# Altium PCB STM32.PcbDoc
Units mm, origin at the board's own origin, x right, y up, seen from the top; angles counter-clockwise.
Board outline 45.5 x 80.5 mm, 2 copper layers (Top Layer, Bottom Layer); 57 components, 45 nets, 197 pads, 14 vias.
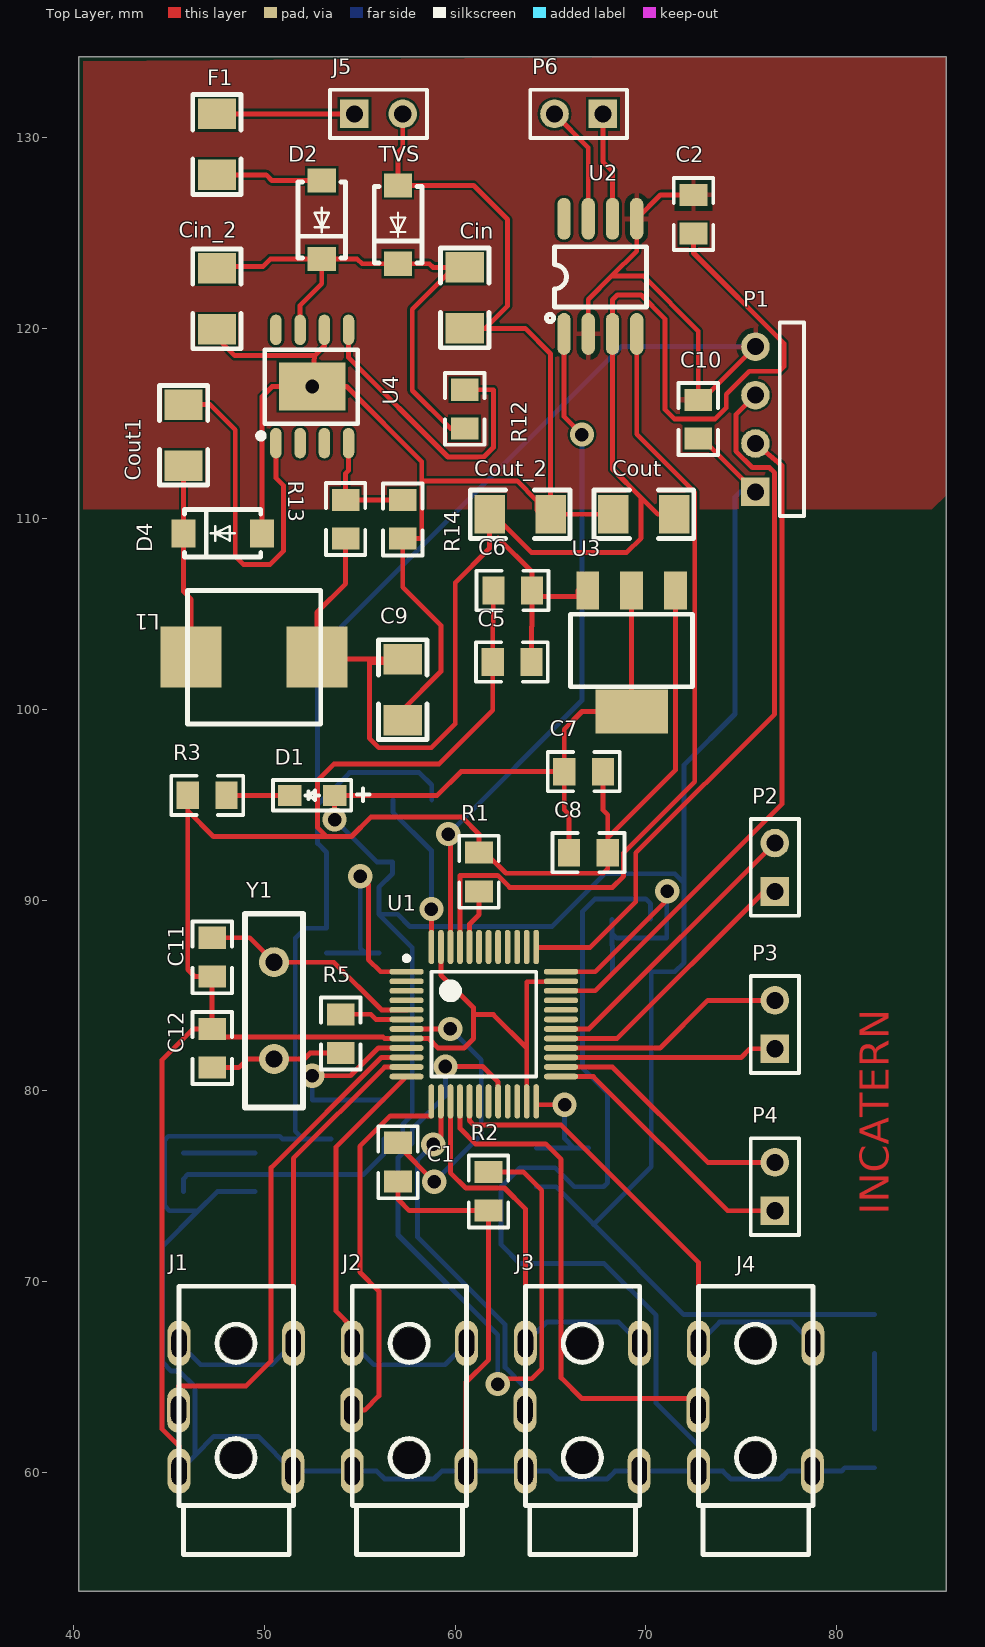
[diagram p0: Top Layer view]
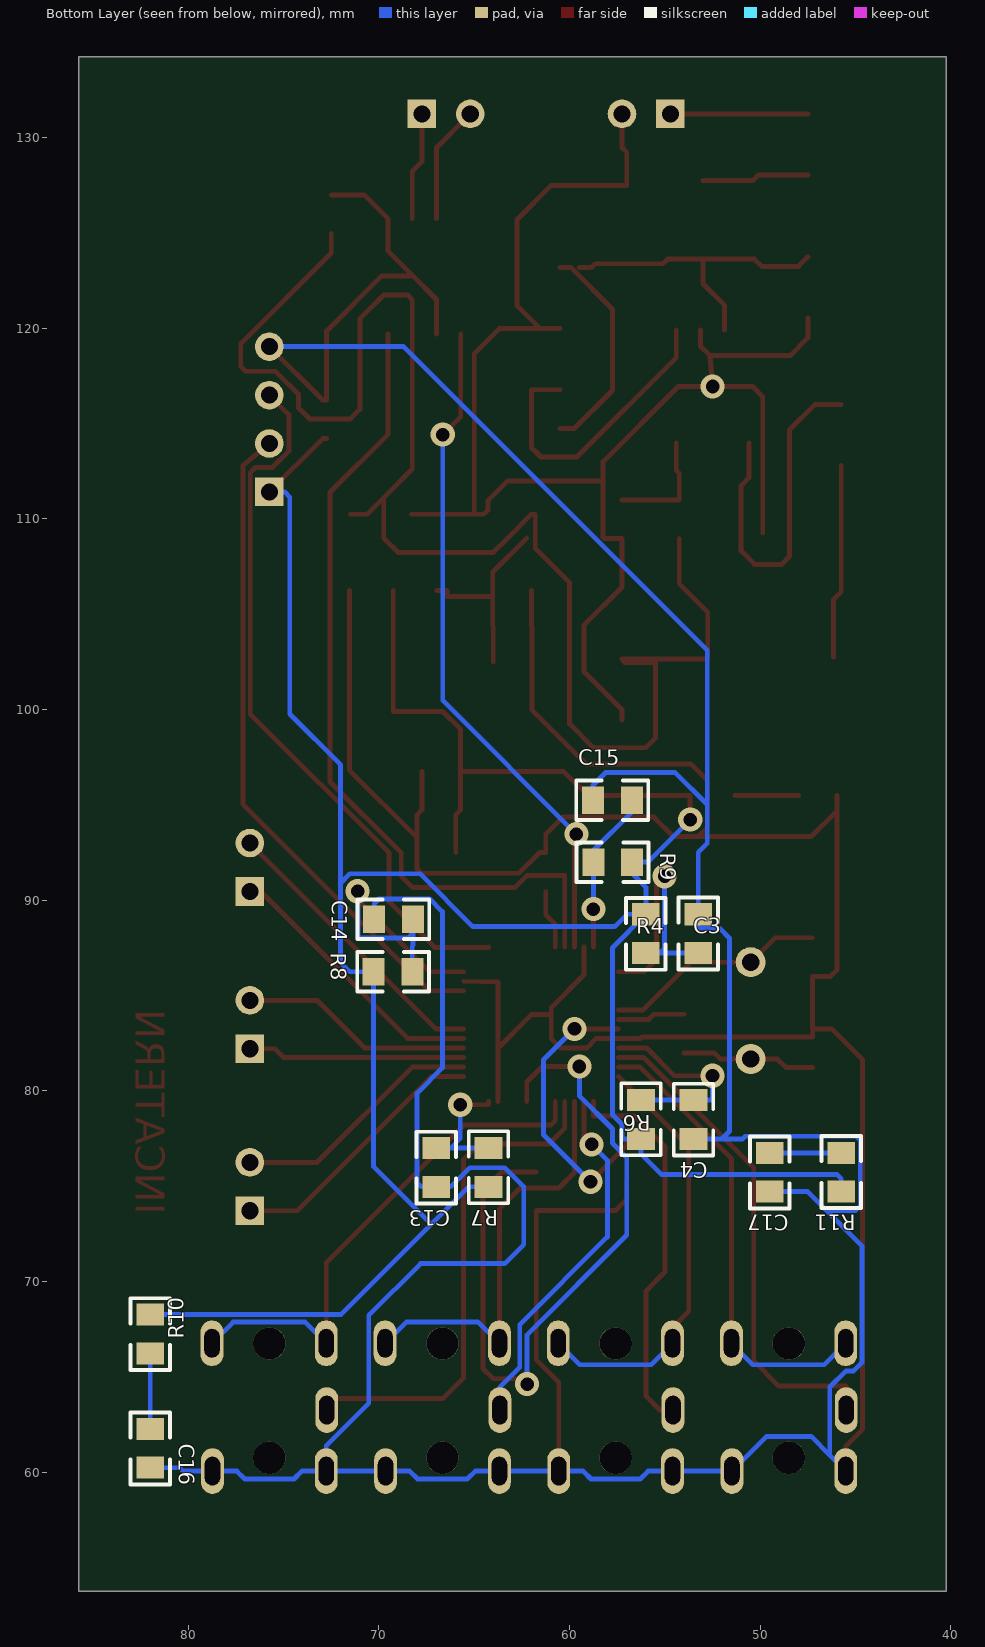
[diagram p1: Bottom Layer view, seen from below]

## Layer stack, top to bottom
Top Solder: solder mask 0.0102, Solder Resist, Dk 3.5
Top Layer: signal copper 0.0356
Dielectric 1: dielectric 0.32, FR-4, Dk 4.8
Bottom Layer: signal copper 0.0356
Bottom Solder: solder mask 0.0102, Solder Resist, Dk 3.5

## Board outline
40.25,53.75 40.25,134.25 85.75,134.25 85.75,53.75

## Design rules (kind name [scope] priority, off if disabled: settings)
Clearance [All] p1: gap=0.127 ignorepadtopadclearanceinfootprint=FALSE
PolygonConnect [All] p1: connectstyle=Relief reliefconductorwidth=0.254 reliefentries=4 polygonreliefangle="90 Angle" airgapwidth=0.254
RoutingVias [All] p1: holewidth=0.711 width=1.27 viastyle="Through Hole" minholewidth=0.711 minwidth=1.27 maxholewidth=0.711 maxwidth=1.27
SolderMaskExpansion [All] p1: expansion=0.102
Width [All] p1: maxlimit=0.254 minlimit=0.254 preferedwidth=0.254
30 further rules are at their usual default settings.

## Classes and differential pairs
component class POWER: C9 Cin Cin_2 Cout Cout1 Cout_2 D2 D4 F1 J5 L1 R12 R13 R14 TVS U4
component class STM32: C1 C2 C3 C4 C5 C6 C7 C8 C10 C11 C12 C13 C14 C15 C16 C17 D1 J1 J2 J3 J4 P1 P2 P3 P4 P6 R1 R2 R3 R4 R5 R6 R7 R8 R9 R10 R11 U1 U2 U3 Y1

## Components (designator, comment, footprint, x,y, rotation, side; value= is the part's Value field where it differs from the comment)
C1 "0.1uF" 0805 57,76.266 r90 top value=104
C2 "100nF" 0805 72.5,125.984 r270 top value=104
C3 "100nF" 0805 53.25,88.25 r270 bottom value=104
C4 "1uF" 0805 53.5,78.5 r90 bottom value=104
C5 "105,0603" 0805 62.984,102.5 r0 top value=104
C6 "105,0603" 0805 63.016,106.25 r0 top value=104
C7 "" 0805 66.734,96.75 r180 top value=100nF
C8 "105,0603" 0805 66.984,92.5 r180 top value=10uF
C9 "Cap Pol3" 1206 57.25,101 r270 top value=220uF
C10 "104" 0805 72.75,115.234 r270 top
C11 "105,0603" 0805 47.25,87.016 r90 top value=104
C12 "105,0603" 0805 47.25,82.234 r270 top value=104
C13 "1uF" 0805 67,75.984 r90 bottom value=104
C14 "1uF" 0805 69.234,89 r180 bottom value=104
C15 "1uF" 0805 57.75,95.25 r180 bottom value=104
C16 "1uF" 0805 82,61.25 r90 bottom value=104
C17 "1uF" 0805 49.5,75.734 r90 bottom value=104
Cin "GRM32ER71J106KA12L" 1206 60.5,121.549 r270 top value=4.7uF
Cin_2 "GRM32ER71J106KA12L" 1206 47.5,121.5 r270 top value=4.7uF
Cout "C1608X5R1A226M080AC" 1206 69.849,110.25 r180 top value=10uF
Cout1 "C1608X5R1A226M080AC" 1206 45.75,114.349 r270 top value=10pF
Cout_2 "C1608X5R1A226M080AC" 1206 63.451,110.25 r0 top value=1uF
D1 "LED" LED 52.5,95.5 r0 top
D2 "Diode 1N4007" SMA(DO-214AC) 53,125.718 r270 top
D4 "B340A-E3/61T" SMA(DO-214AC) 47.833,109.25 r180 top
F1 "Fuse 2" 1206 47.5,129.599 r270 top
J1 "S0" AUDIO-PJ313D 48.5,63.448 r180 top
J2 "S1" AUDIO-PJ313D 57.583,63.448 r180 top
J3 "S2" AUDIO-PJ313D 66.667,63.448 r180 top
J4 "S3" AUDIO-PJ313D 75.75,63.448 r180 top
J5 "2 Pin" HDR1X2 54.71,131.25 r0 top
L1 "22uH" L7070 49.448,102.75 r0 top
P1 "SWD" HDR1X4H 75.75,111.42 r90 top
P2 "Header 2" HDR1X2 76.77,90.46 r90 top
P3 "Header 2" HDR1X2 76.77,82.21 r90 top
P4 "Header 2" HDR1X2 76.77,73.71 r90 top
P6 "Header 2" HDR1X2 67.75,131.25 r180 top
R1 "10K,0603" 0805 61.25,91.484 r270 top
R2 "10K,0603" 0805 61.75,74.734 r90 top
R3 "10K,0603" 0805 46.984,95.5 r180 top
R4 "10K,0603" 0805 56,88.25 r90 bottom
R5 "1M,0603" 0805 54,83 r270 top
R6 "10K,0603" 0805 56.25,78.5 r270 bottom
R7 "10K,0603" 0805 64.25,75.984 r270 bottom
R8 "10K,0603" 0805 69.266,86.25 r0 bottom
R9 "10K,0603" 0805 57.734,92 r180 bottom
R10 "10K,0603" 0805 82,67.25 r90 bottom
R11 "10K,0603" 0805 45.75,75.734 r270 bottom
R12 "" 0805 60.5,115.766 r270 top
R13 "10K,0603" 0805 54.25,109.984 r270 top
R14 "3.2k" 0805 57.25,109.984 r90 top
TVS "TVS" SMA(DO-214AC) 57,125.468 r270 top (schematic designator D3)
U1 "STM32F103C8T6" 48P 61.5,83.5 r0 top
U2 "TJA1050" SOIC-8_150MIL 67.615,122.753 r90 top
U3 "LD1117S33CTR" SOT-223 69.25,103.075 r270 top
U4 "TPS5430DDAR" SOP-8_EP_150MIL 52.5,117 r90 top
Y1 "32.768K" XTAL1 50.5,81.67 r90 top

## Footprints (in the part's own frame and the unit in brackets; to place one, negate y for a bottom-side part, rotate by r counter-clockwise, add the part's x,y. Pads: shape width x height; smd on the part's side, far side on the other; paste and mask are expansions set on the pad)
48P [mm]
  oval 1.8x0.3 smd: 1(-4.05,2.75) 2(-4.05,2.25) 3(-4.05,1.75) 4(-4.05,1.25) 5(-4.05,0.75) 6(-4.05,0.25) 7(-4.05,-0.25) 8(-4.05,-0.75) 9(-4.05,-1.25) 10(-4.05,-1.75) 11(-4.05,-2.25) 12(-4.05,-2.75) 25(4.05,-2.75) 26(4.05,-2.25) 27(4.05,-1.75) 28(4.05,-1.25) 29(4.05,-0.75) 30(4.05,-0.25) 31(4.05,0.25) 32(4.05,0.75) 33(4.05,1.25) 34(4.05,1.75) 35(4.05,2.25) 36(4.05,2.75)
  oval 0.3x1.8 smd: 13(-2.75,-4.05) 14(-2.25,-4.05) 15(-1.75,-4.05) 16(-1.25,-4.05) 17(-0.75,-4.05) 18(-0.25,-4.05) 19(0.25,-4.05) 20(0.75,-4.05) 21(1.25,-4.05) 22(1.75,-4.05) 23(2.25,-4.05) 24(2.75,-4.05) 37(2.75,4.05) 38(2.25,4.05) 39(1.75,4.05) 40(1.25,4.05) 41(0.75,4.05) 42(0.25,4.05) 43(-0.25,4.05) 44(-0.75,4.05) 45(-1.25,4.05) 46(-1.75,4.05) 47(-2.25,4.05) 48(-2.75,4.05)
  silkscreen extent -4.17,-2.75 2.75,3.57, body extent -3.5,-3.5 3.5,3.5, height 1.6
0805 [mm]
  rect 1.16x1.45 smd: 1(-1.016,0) 2(1.016,0)
  silkscreen extent -1.9,-1.03 1.87,1.04
1206 [mil]
  rect 63x78.74 smd: 1(-65,0) 2(60.98,0)
  silkscreen extent -105,-50 101,50
AUDIO-PJ313D [mm]
  round 1.7 hole 1.7: 0(0,2.692) 0(0,-3.302)
  oval 1.2x2.4 hole 0.8 slot 1.5 at 90 deg: 2(-2.984,3.392) 2(2.985,3.392) 3(3.01,0.192) 4(-3.01,-3.314) 4(2.985,-3.314)
  silkscreen extent -3.02,-6.3 2.98,7.76
HDR1X2 [mm] "Connector; Header; 2 Position"
  rect 1.5x1.5 hole 0.9: 1(0,0)
  round 1.5 hole 0.9: 2(2.54,0)
  silkscreen extent -1.27,-1.27 3.81,1.27
HDR1X4H [mm] "Connector; Header; 4 Position; Right Angle"
  rect 1.5x1.5 hole 0.9: 1(0,0)
  round 1.5 hole 0.9: 2(2.54,0) 3(5.08,0) 4(7.62,0)
  silkscreen extent -1.27,-2.54 8.89,-1.27
L7070 [mm]
  rect 3.2x3.2 smd: 1(-3.298,0) 2(3.302,0)
  silkscreen extent -3.5,-3.5 3.5,3.5
LED [mil]
  rect 49x43 smd: 1(46.26,0) 2(-46.26,0)
  silkscreen extent -81,-31 118,31
SMA(DO-214AC) [mil]
  rect 50x57.9 smd: 1(-80,0) 2(82,0)
  silkscreen extent -77,-49 80,49
SOIC-8_150MIL [mm]
  oval 2.2x0.7 smd: 1(-3.048,1.905) 2(-3.048,0.635) 3(-3.048,-0.635) 4(-3.048,-1.905) 5(2.997,-1.905) 6(2.997,-0.635) 7(2.997,0.635) 8(2.997,1.905)
  silkscreen extent -2.4,-2.41 1.52,2.83
SOP-8_EP_150MIL [mm]
  oval 1.6x0.6 smd: 1(-3.023,1.905) 2(-3.023,0.635) 3(-3.023,-0.635) 4(-3.023,-1.905) 5(2.921,-1.905) 6(2.921,-0.635) 7(2.921,0.635) 8(2.921,1.905)
  rect 2.5x3.5 smd: 9(-0.051,0)
  silkscreen extent -2.79,-2.39 1.88,2.84
SOT-223 [mm]
  rect 2x1.2 smd: 1(-3.175,2.3) 2(-3.175,0) 3(-3.175,-2.3)
  rect 2.3x3.8 smd: 4(3.175,0)
  silkscreen extent -1.92,-3.2 1.87,3.2
XTAL1 [mil]
  round 62 hole 35.43: 1(0,0) 2(200,0)
  silkscreen extent -100,-60 300,60

## Part data
C1 C2 C3 C4 C5 C6 C7 C8 C10 C11 C12 C13 C14 C15 C16 C17: library part Cap, "Capacitor", LatestRevisionDate=17-Jul-2002, LatestRevisionNote="Re-released for DXP Platform.", Published=8-Jun-2000, Publisher="Altium Limited"
C9: "Polarized Capacitor (Surface Mount)", LatestRevisionDate=29-May-2009, LatestRevisionNote="IPC-7351 Footprint Added.", PackageDescription="Chip Capacitor", PackageReference=C0805, Published=8-Jun-2000, Publisher="Altium Limited"
Cin Cin_2: "GRM32ER71J106KA1", Manufacturer Name=MuRata, Manufacturer Part Number=GRM32ER71J106KA12L, PackageReference=GRM32ER71J106KA12L
Cout Cout1 Cout_2: "C1608X5R1A226M08", Manufacturer Name=TDK, Manufacturer Part Number=C1608X5R1A226M080AC, PackageReference=C1608X5R1A226M080AC
D2: "1 Amp General Purpose Rectifier", Code_JEDEC=DO-204-AL, ComponentLink1Description="Manufacturer Link", ComponentLink1URL=http://www.fairchildsemi.com/, ComponentLink2Description=Datasheet, ComponentLink2URL=http://www.fairchildsemi.com/ds/1N%2F1N4001.pdf, DatasheetVersion=1998, LatestRevisionDate=17-Jul-2002, LatestRevisionNote="Re-released for DXP Platform.", PackageDescription="Diode, Axial; Body 5.2 x 2.7 mm (LxDia. max), Lead Dia. 0.86 mm (max)", PackageReference=DO-41, PackageVersion=Aug-1999, Published=8-Jun-2000, Publisher="Altium Limited"
D4: BOM_Manufacturer=VISHAY, BOM_Manufacturer Part=B340A-E3/61T, BOM_Supplier=LCSC, BOM_Supplier Part=C15570, image=//image.lceda.cn/szlcsc/C15570.jpg, spicePre=D
F1: "Fuse", LatestRevisionDate=17-Jul-2002, LatestRevisionNote="Re-released for DXP Platform.", PackageDescription="Thru-Hole; 2 Leads", PackageReference=PIN-W2/E2.8, Published=8-Jun-2000, Publisher="Altium Limited"
J1 J2 J3 J4: library part Stereo-jack, BOM_Manufacturer=BOOMELE, BOM_Manufacturer Part="Straight headphone jack", BOM_Supplier=LCSC, BOM_Supplier Part=C18167, spicePre=J
L1: library part 100uH, BOM_Manufacturer=TAITEC, BOM_Manufacturer Part=NLV32T-150J-PF, BOM_Supplier=LCSC, BOM_Supplier Part=C304294, Contributor=LCSC, nameAlias=Inductance, spicePre=L, spiceSymbolName=FPI0705F-101M
P1: library part "Header 4", "Header, 4-Pin", LatestRevisionDate=17-Jul-2002, LatestRevisionNote="Re-released for DXP Platform.", Publisher="Altium Limited"
P2 P3 P4 P6: "Header, 2-Pin", LatestRevisionDate=17-Jul-2002, LatestRevisionNote="Re-released for DXP Platform.", Publisher="Altium Limited"
R1 R2 R3 R4 R5 R6 R7 R8 R9 R10 R11 R12 R13 R14: library part Res2, "Resistor", LatestRevisionDate=17-Jul-2002, LatestRevisionNote="Re-released for DXP Platform.", Published=8-Jun-2000, Publisher="Altium Limited"
TVS: library part "Diode 1N4007", "1 Amp General Purpose Rectifier", Code_JEDEC=DO-204-AL, ComponentLink1Description="Manufacturer Link", ComponentLink1URL=http://www.fairchildsemi.com/, ComponentLink2Description=Datasheet, ComponentLink2URL=http://www.fairchildsemi.com/ds/1N%2F1N4001.pdf, DatasheetVersion=1998, LatestRevisionDate=17-Jul-2002, LatestRevisionNote="Re-released for DXP Platform.", PackageDescription="Diode, Axial; Body 5.2 x 2.7 mm (LxDia. max), Lead Dia. 0.86 mm (max)", PackageReference=DO-41, PackageVersion=Aug-1999, Published=8-Jun-2000, Publisher="Altium Limited"
U3: BOM_Manufacturer=STMicroelectronics, BOM_Manufacturer Part=LD1117S33CTR, BOM_Supplier=LCSC, BOM_Supplier Part=C35879, image=//image.lceda.cn/szlcsc/C35879.jpg, spicePre=U
U4: BOM_LCSC Assembly=Yes, BOM_Manufacturer=TI, BOM_Manufacturer Part=TPS5430DDAR, BOM_Supplier=LCSC, BOM_Supplier Part=C9864, image=//image.lceda.cn/szlcsc/C9864.jpg, spicePre=U
Y1: library part XTAL, "Crystal Oscillator", LatestRevisionDate=17-Jul-2002, LatestRevisionNote="Re-released for DXP Platform.", Published=8-Jun-2000, Publisher="Altium Limited"

## Via types
v1: diameter 1.27, hole 0.711, Top Layer to Bottom Layer, 14 vias

## Nets (pads, with @x,y where several pads share a name; then routed paths per layer and width w, separated by ;. In a path a pad name is that pad's centre, name@x,y a point inside that pad or via, vN(x,y) a via of type N, cw(c..) or ccw(c..) an arc to the next point about the centre after c; other vN are vias at no path point)
0: C9.2 Cin.2 Cin_2.2 Cout.2 Cout_2.2 D4.1 J5.2 R14.1 TVS.1 U4.6 U4.9 | length 84.4
  Top Layer w0.254: Cin_2.2@47.5,120.55 Cin_2.2 47.5,119.5 48.433,118.567 52.627,118.567 ; D4.1 49.865,116.42 50.394,116.949 v1(52.5,116.949) ; U4.6 53.135,119.075 52.627,118.567 ; C9.2 57.25,100 59.25,102 59.25,104.426 57.25,106.426 R14.1 58.191,108.968 58.242,109.019 58.242,112 ; J5.2 57.25,129.485 57,129.235 TVS.1 60.96,127.5 62.75,125.71 62.75,121.18 61.57,120 ; Cin.2 61.57,120 ; Cout.2 Cout_2.2 ; v1(52.5,116.949) 54.305,116.949 58.242,113.012 58.242,112 ; v1(52.5,116.949) 52.627,118.567 ; 58.242,112 63.25,112 64.285,110.965 64.285,110.465 64.5,110.25 Cout_2.2 ; 61.57,120 63.669,120 65,118.669 Cout_2.2
5V: C2.2 C5.2 C6.2 C9.1 Cout.1 Cout_2.1 L1.2 R13.2 U2.3 U3.3 | length 94
  Top Layer w0.254: R13.2 54.25,106.605 52.75,105.105 L1.2 52.849,102.651 C9.1 57.125,102.476 55.5,102.476 55.5,98.5 56,98 58.75,98 60,99.25 60,106.66 61.8,108.46 Cout_2.1 62,110.25 63.25,109 64,108.25 69,108.25 69.75,109 69.75,111.123 ; 62.25,109 64.032,107.218 C6.2 C6.2@64.032,105.941 ; C5.2 64,104.343 64.032,104.375 C6.2@64.032,105.941 ; U3.3 66.426,106.25 66.426,105.941 C6.2@64.032,105.941 ; Cout.1 70.623,110.25 69.75,111.123 ; C2.2 72.5,123.952 77.25,119.202 77.25,118.001 76.999,117.75 75.43,117.75 74.219,116.539 74.219,115.824 73.645,115.25 71.5,115.25 71,115.75 71,120.5 69.75,121.75 68.5,121.75 68.25,121.5 U2.3 68.25,112.623 69.75,111.123
"12 VOLT": F1.1 J5.1 | length 7.2
  Top Layer w0.254: F1.1 J5.1
A0: J1.3 U1.10 | length 26.3
  Top Layer w0.254: J1.3 45.49,64.515 49.021,64.515 50.343,65.837 50.343,75.975 56.118,81.75 U1.10
A1: J2.4 U1.12 | length 22.8
  Top Layer w0.254: J2.4@54.599,66.762 54.599,67.589 53.75,68.438 53.75,77.071 57.429,80.75 U1.12
  Bottom Layer w0.254: J2.4@54.599,66.762 55.727,65.634 59.465,65.634 J2.4@60.593,66.762
A2: J3.3 U1.14 | length 19
  Top Layer w0.254: v1(58.844,77.191) 59.25,77.597 U1.14
  Bottom Layer w0.254: v1(58.844,77.191) 58.014,76.361 58.014,72.339 62.614,67.738 62.614,65.494 63.657,64.452 J3.3
A3: J4.3 U1.16 | length 27.1
  Top Layer w0.254: U1.16 60.25,78.029 61.063,77.216 64.745,77.216 65.557,76.403 65.557,64.948 66.65,63.856 72.74,63.856 J4.3
B0: J1.4 U1.11 | length 24.6
  Top Layer w0.254: J1.4@51.51,66.762 51.51,76.464 56.296,81.25 U1.11
  Bottom Layer w0.254: J1.4@45.515,66.762 46.644,65.634 50.382,65.634 J1.4@51.51,66.762
B1: J2.3 U1.13 | length 20.4
  Top Layer w0.254: J2.3 55.256,63.256 56,64 56,69.5 55,70.5 55,77.095 56.594,78.689 58.75,78.689 U1.13
B2: J3.4 U1.15 | length 22.4
  Top Layer w0.254: U1.15 59.75,75.708 60.554,74.905 62.586,74.905 63.682,73.808 J3.4@63.682,66.762
  Bottom Layer w0.254: J3.4@63.682,66.762 64.789,67.869 68.569,67.869 J3.4@69.677,66.762
B3: J4.4 U1.17 | length 27.3
  Top Layer w0.254: U1.17 60.75,78.435 60.979,78.207 65.552,78.207 72.766,70.993 J4.4@72.766,66.762
  Bottom Layer w0.254: J4.4@72.766,66.762 73.873,67.869 77.653,67.869 J4.4@78.76,66.762
BOOT0: R1.2 U1.44 | length 3.1
  Top Layer w0.254: U1.44 60.75,88.748 61.25,89.248 R1.2
BOOT1: R2.2 U1.20 | length 39.2
  Top Layer w0.254: v1(59.487,81.28) 61.437,81.28 62.25,80.467 U1.20 ; R2.2 63.569,75.75 64.541,74.778 64.541,65.43 64.008,64.897 62.509,64.897 v1(62.23,64.618)
  Bottom Layer w0.254: v1(59.487,81.28) 59.487,79.737 57.75,78 57.75,77.25 57,76.5 57,72.438 62.23,67.208 v1(62.23,64.618)
GND: C1.1 C2.1 C3.1 C4.1 C5.1 C6.1 C7.1 C8.1 C10.1 C11.1 C12.1 C13.1 C14.1 C15.1 C16.1 C17.1 J1.2 J2.2 J3.2 J4.2 P1.4 R1.1 R2.1 R3.2 U1.8 U1.23 U1.35 U1.47 U2.2 U2.5 U3.1 | length 362.8
  Top Layer w0.254: J1.2@45.515,60.056 45.515,61.366 44.628,62.254 44.628,81.624 46.253,83.25 C12.1@47.244,83.25 ; R3.2 45.968,94.691 ; C1.1 57,74.316 57.598,73.718 R2.1 61.75,65.903 60.568,64.721 J2.2@60.568,60.056 ; U1.47 59.25,86.081 60.96,84.371 60.96,84 ; C6.1 62,104.375 61.968,104.343 C5.1 61.968,99.968 59.155,97.155 53.645,97.155 52.781,96.291 52.781,93.802 53.238,93.345 ; U1.23 63.75,82.25 ; U1.35 63.75,85.721 63.75,82.25 ; U2.2 66.98,121.514 68.216,122.75 ; C7.1 67.75,94.738 68,94.488 68,93.269 ; U3.1 71.55,96.819 68,93.269 ; C2.1 70.77,127 U2.5 69.52,124.054 68.216,122.75 ; P1.4 72.96,116.25 C10.1 72.75,119.858 69.858,122.75 68.216,122.75 ; 45.968,94.691 47.314,93.345 53.238,93.345 ; 45.968,94.691 45.968,86.36 46.328,86 C11.1 C12.1 C12.1@47.244,83.25 ; C12.1@47.244,83.25 47.244,82.829 56.207,82.829 56.286,82.75 U1.8 58.598,82.75 59.103,82.245 60.46,82.245 60.96,82.745 60.96,84 ; 53.238,93.345 54.559,93.345 55.575,94.361 60.361,94.361 61.25,93.472 R1.1 61.579,92.5 62.664,91.415 67.771,91.415 68,91.643 C8.1 68,93.269 ; 60.96,84 62,84 63.75,82.25
  Bottom Layer w0.254: J1.2@45.515,60.056 46.355,60.896 ; C17.1 47.515,74.718 46.507,73.711 ; C4.1 52.019,77.484 ; C15.1 58.766,96.047 58.115,96.698 54.458,96.698 52.781,95.021 ; C14.1 70.25,89.814 69.996,90.068 67.335,90.068 66.675,89.408 66.675,81.204 67.996,79.883 67.996,75.184 67.78,74.968 C13.1 66.243,74.968 65.24,75.971 63.398,75.971 62.408,74.981 62.408,71.933 63.398,70.942 67.818,70.942 70.536,68.224 70.536,63.622 72.766,61.392 J4.2@72.766,60.056 ; P1.4 68.707,119.04 52.781,103.114 52.781,95.021 ; C16.1 80.442,60.234 80.264,60.056 78.735,60.056 77.455,60.056 77.038,59.639 74.458,59.639 74.041,60.056 J4.2@72.766,60.056 ; 46.355,60.896 46.355,64.465 45.517,65.303 45.11,65.303 44.653,65.761 44.653,71.857 46.507,73.711 ; 46.355,60.896 47.334,61.874 49.666,61.874 51.484,60.056 54.599,60.056 55.88,60.056 56.297,59.639 58.877,59.639 59.294,60.056 60.568,60.056 63.682,60.056 64.948,60.056 65.365,59.639 67.97,59.639 68.387,60.056 69.651,60.056 J4.2@72.766,60.056 ; 46.507,73.711 45.009,73.711 44.755,73.965 44.755,77.419 44.958,77.622 50.789,77.622 50.927,77.484 52.019,77.484 ; 52.019,77.484 51.613,77.89 51.613,88.011 52.132,88.531 53.25,88.531 C3.1 53.25,92.513 52.781,92.982 52.781,95.021
NetC12_2: C12.2 R5.2 Y1.1 | length 7.1
  Top Layer w0.254: C12.2 48.641,81.218 49.093,81.67 Y1.1 52.07,81.67 52.384,81.984 R5.2
NetC16_2: C16.2 R10.1 | length 4
  Bottom Layer w0.254: C16.2 R10.1
NetC17_2: C17.2 R11.1 | length 3.7
  Bottom Layer w0.254: R11.1 C17.2
NetCin_1: Cin.1 Cin_2.1 D2.2 R12.2 TVS.2 U4.7 | length 28.2
  Top Layer w0.254: Cin_2.1@47.5,123.75 48,123.25 49.92,123.25 50.305,123.635 D2.2 ; U4.7 51.865,121.209 53,122.344 D2.2 ; 59.497,123.2 58.834,123.2 58.649,123.385 TVS.2 55.114,123.385 54.864,123.635 D2.2 ; R12.2 59.741,114.75 57.75,116.741 57.75,121 59.95,123.2 Cin.1
NetCout1_1: Cout1.1 U4.1 | length 18.7
  Top Layer w0.254: Cout1.1 47.142,116 48.463,114.679 48.463,108.037 48.88,107.62 50.292,107.62 51,108.328 51,111.75 50.595,112.155 U4.1
NetCout1_2: Cout1.2 D4.2 L1.1 | length 10.2
  Top Layer w0.254: Cout1.2 D4.2 45.75,106.191 46.15,105.791 L1.1
NetD1_K: D1.2 R3.1 | length 3.3
  Top Layer w0.254: R3.1 D1.2
NetD2_1: D2.1 F1.2 | length 5.6
  Top Layer w0.254: F1.2 50.089,128.05 50.389,127.75 D2.1
NetP6_1: P6.1 U2.6 | length 5.7
  Top Layer w0.254: P6.1 67.75,128.745 68.25,128.245 U2.6
NetP6_2: P6.2 U2.7 | length 6.2
  Top Layer w0.254: P6.2 66.98,129.48 U2.7
NetR12_1: R12.1 U4.5 | length 15.9
  Top Layer w0.254: U4.5 54.405,118.466 59.621,113.25 61.5,113.25 62,113.75 62,116.782 R12.1
NetR13_1: R13.1 R14.2 U4.4 | length 6
  Top Layer w0.254: U4.4 54.405,112.55 54.25,112.395 R13.1 R14.2
OP_1: P2.2 U1.30 | length 15.3
  Top Layer w0.254: U1.30 67.02,83.25 P2.2
OP_2: P2.1 U1.29 | length 14.4
  Top Layer w0.254: U1.29 68.5,82.75 76.21,90.46 P2.1
OP_3: P3.2 U1.28 | length 12.3
  Top Layer w0.254: U1.28 70.75,82.25 73.25,84.75 P3.2
OP_4: P3.1 U1.27 | length 11.4
  Top Layer w0.254: U1.27 75,81.75 75.46,82.21 P3.1
OP_5: P4.2 U1.26 | length 13.3
  Top Layer w0.254: U1.26 68.25,81.25 73.25,76.25 P4.2
OP_6: P4.1 U1.25 | length 14.1
  Top Layer w0.254: U1.25 67.25,80.75 74.29,73.71 P4.1
OSCIN: C11.2 U1.5 Y1.2 | length 11.8
  Top Layer w0.254: C11.2 49.218,88.032 Y1.2 53.634,86.75 56.134,84.25 U1.5
OSCOUT: R5.1 U1.6 | length 3.6
  Top Layer w0.254: R5.1 55.575,84.016 55.841,83.75 U1.6
RESET: C1.2 U1.7 | length 14.8
  Top Layer w0.254: C1.2 57,77.137 v1(58.903,75.235) ; U1.7 v1(59.741,83.25)
  Bottom Layer w0.254: v1(58.903,75.235) 61.366,77.699 61.366,81.624 v1(59.741,83.25)
RXD: U1.45 U2.4 | length 44.1
  Top Layer w0.254: U1.45 60.25,91.302 62.23,91.302 62.854,90.678 68.25,90.678 68.834,91.262 68.834,92.481 72.568,96.215 72.568,111.404 69.52,114.452 U2.4
SWDCLK: P1.3 U1.37 | length 37.6
  Top Layer w0.254: U1.37 64.25,87.528 67.081,87.528 69.469,89.916 69.469,92.481 76.754,99.766 76.754,112.424 76.478,112.7 75.59,112.7 74.727,113.563 74.727,115.477 P1.3
SWDIO: P1.2 U1.34 | length 35.2
  Top Layer w0.254: U1.34 67.35,85.25 77.135,95.035 77.135,112.805 P1.2
TXD: U1.46 U2.1 | length 35.5
  Top Layer w0.254: v1(59.639,93.472) 59.75,93.361 U1.46 ; U2.1 65.71,115.367 v1(66.65,114.427)
  Bottom Layer w0.254: v1(59.639,93.472) 66.65,100.482 v1(66.65,114.427)
VBAT: C3.2 R4.1 U1.1 | length 13.7
  Top Layer w0.254: v1(55.016,91.262) 55.448,90.83 55.448,86.885 56.083,86.25 U1.1
  Bottom Layer w0.254: C3.2 55.27,87.234 ; v1(55.016,91.262) 55.016,87.488 55.27,87.234 ; R4.1 55.27,87.234
VCC3V3: C7.2 C8.2 C10.2 D1.1 P1.1 R4.2 R6.2 R7.2 R8.2 R9.2 R10.2 R11.2 U3.2 U3.4 | length 149.3
  Top Layer w0.254: v1(53.67,94.234) 53.675,94.239 D1.1 59.055,95.5 60.305,96.75 C7.2 ; C8.2 65.968,94.488 65.718,94.738 C7.2 ; U3.2 U3.4 66.65,99.9 65.718,98.968 C7.2 ; C10.2 72.952,114.218 P1.1
  Bottom Layer w0.254: R11.2 45.75,75.387 45.979,75.616 55.194,75.616 56.25,76.672 R6.2 57.252,77.484 57.252,78.252 57.75,78.75 57.75,87.516 R4.2 ; v1(53.67,94.234) 55.904,92 R9.2 56.718,91.402 56,90.684 R4.2 ; R7.2 65.291,74.968 67.259,73 ; P1.1 74.946,111.42 74.676,111.15 74.676,99.771 72.009,97.104 72.009,90.907 ; R10.2 71.993,68.266 67.259,73 ; R4.2 56.984,89.266 57.629,88.621 65.075,88.621 67.843,91.389 71.526,91.389 72.009,90.907 ; 67.259,73 70.282,76.022 R8.2 71.526,86.25 72.009,86.733 72.009,90.907
VDD1: C13.2 R7.1 U1.24 | length 6.9
  Top Layer w0.254: U1.24 64.25,79.273 v1(65.735,79.273)
  Bottom Layer w0.254: R7.1 66.243,77 ; v1(65.735,79.273) 65.735,77.508 66.243,77 ; C13.2 66.243,77
VDD2: C14.2 R8.1 U1.36 | length 15.8
  Top Layer w0.254: U1.36 67.336,86.25 71.12,90.034 v1(71.12,90.475)
  Bottom Layer w0.254: C14.2 68.218,88.271 ; R8.1 68.25,87.605 68.218,87.637 68.218,88.271 ; v1(71.12,90.475) 71.095,90.449 71.095,88.011 68.478,88.011 68.218,88.271
VDD3: C15.2 R9.1 U1.48 | length 8.5
  Top Layer w0.254: U1.48 v1(58.75,89.535)
  Bottom Layer w0.254: C15.2 56.734,94.624 58.75,92.608 R9.1 v1(58.75,89.535)
VDDA: C4.2 R6.1 U1.9 | length 10.6
  Top Layer w0.254: v1(52.502,80.797) 54.508,80.797 55.961,82.25 U1.9
  Bottom Layer w0.254: v1(52.502,80.797) 52.502,79.516 C4.2 R6.1
pads on no net: J1.0 J2.0 J3.0 J4.0 U1.2 U1.3 U1.4 U1.18 U1.19 U1.21 U1.22 U1.31 U1.32 U1.33 U1.38 U1.39 U1.40 U1.41 U1.42 U1.43 U2.8 U4.2 U4.3 U4.8

## Polygon pours and split planes (outlines as drawn)
GND on Top Layer "Top Layer-No Net" (solid, pour order 0): 40.25,134.25 40.25,110.5 85.5,110.5 85.75,110.75 85.75,134.25 82.75,134.25 80.25,134.25 77.75,134.25 70.5,134.25

## Other copper
Top Layer:
  text "INCATERN" at 82.75,73.5 h1.52 r90